# Altium PCB TransmitterBoard.PcbDoc
Units mil, origin at the board's own origin, x right, y up, seen from the top; angles counter-clockwise.
Board outline 2932.65 x 3079.69 mil, 2 copper layers (Top Layer, Bottom Layer), stack 61.756 mil thick; 93 components, 55 nets, 263 pads, 204 vias.
Unrouted connection lines stored in the file: 70.
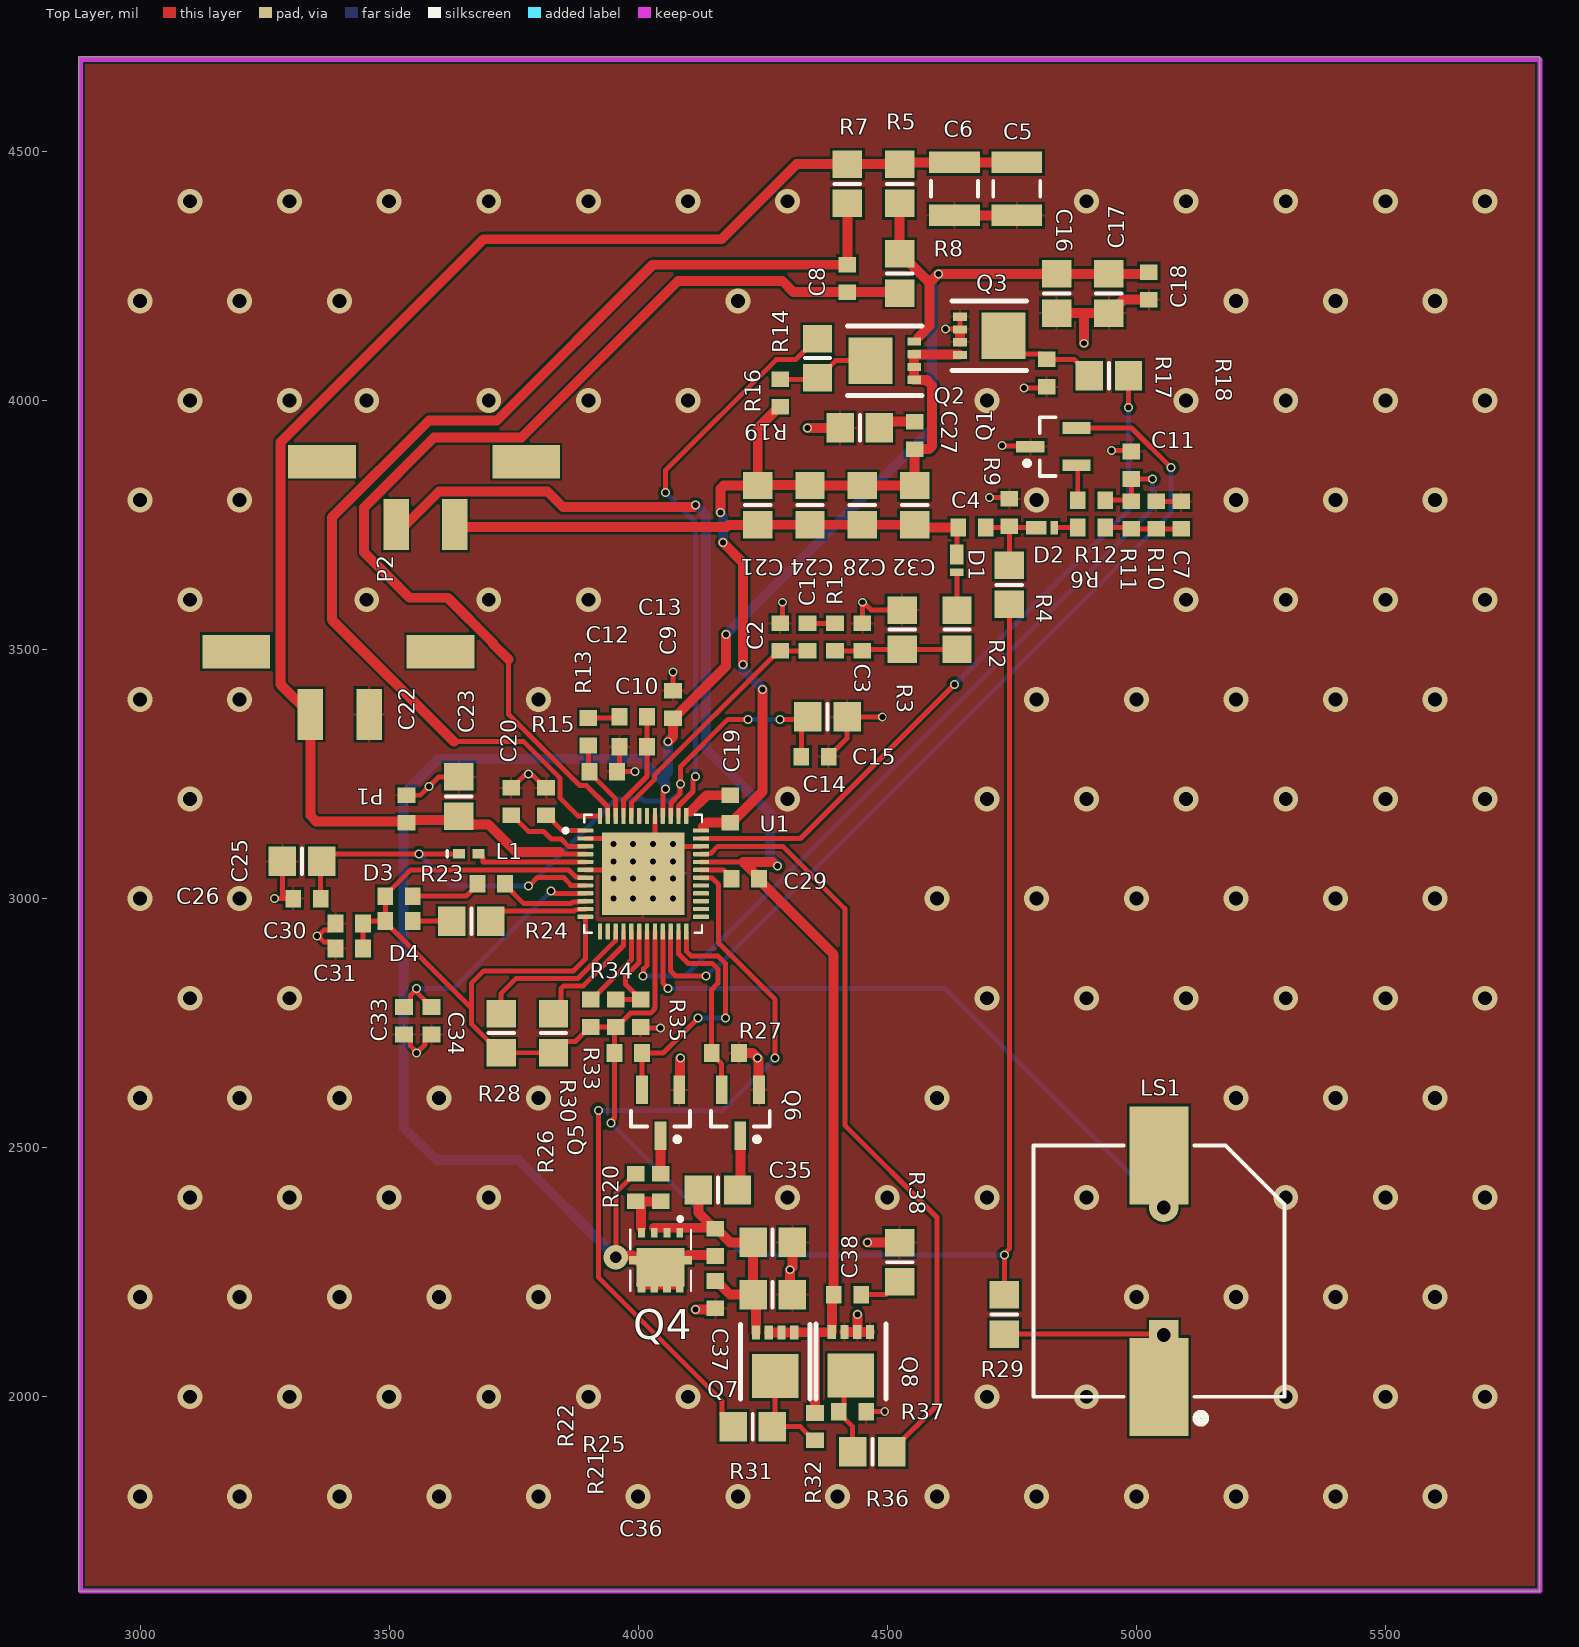
[diagram p0: Top Layer view]
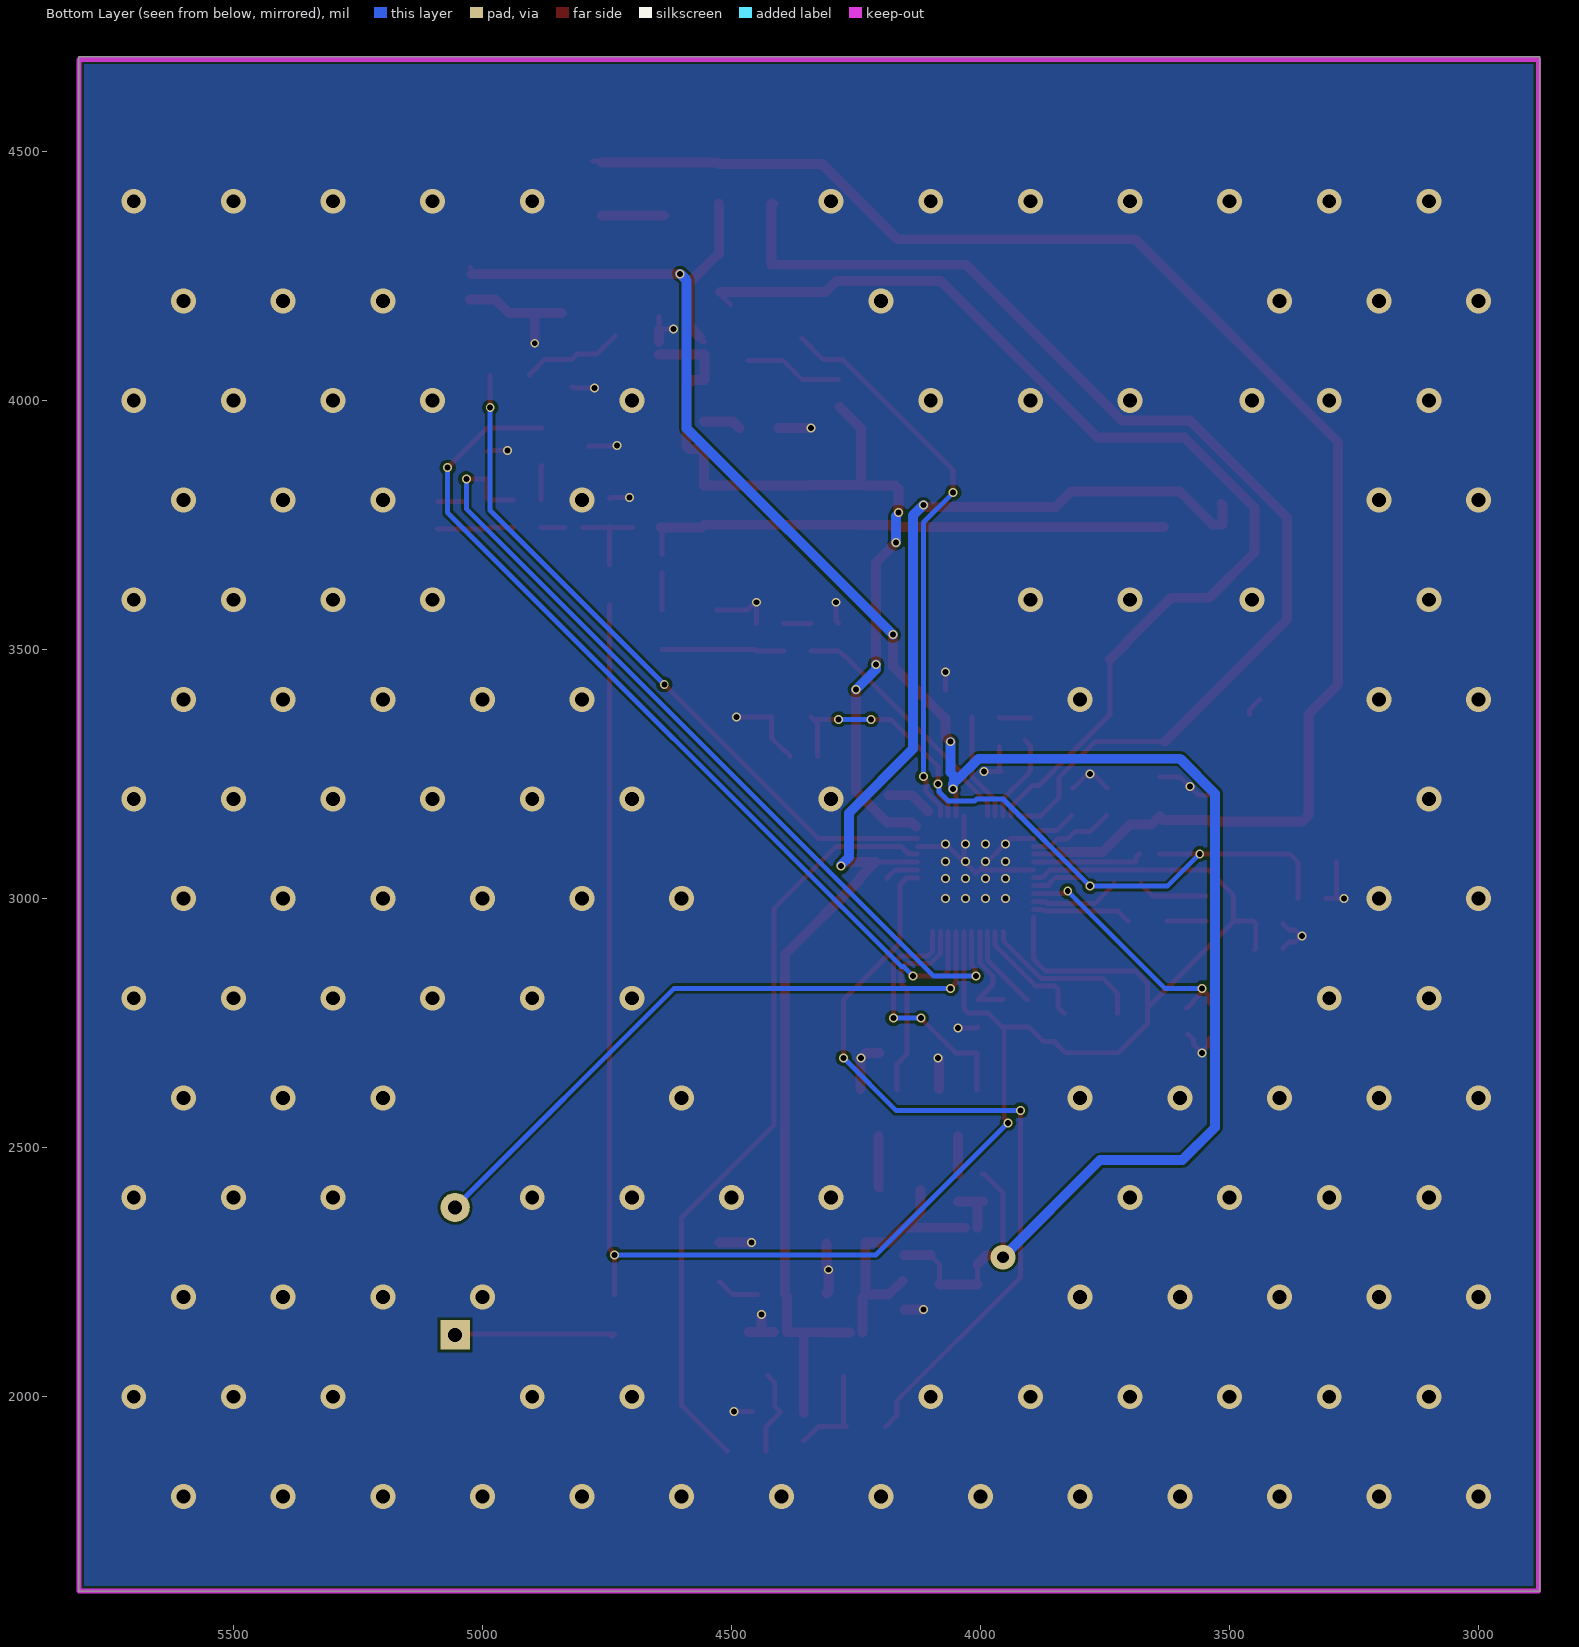
[diagram p1: Bottom Layer view, seen from below]

## Layer stack, top to bottom
Top Solder: solder mask 1, SM-001, Dk 4
Top Layer: signal copper 1.378
Dielectric 1: core 59, Core-043, Dk 4.3
Bottom Layer: signal copper 1.378
Bottom Solder: solder mask 1, SM-001, Dk 4

## Board outline
2877.35,1610 5810,1610 5810,4689.69 2877.35,4689.69

## Design rules (kind name [scope] priority, off if disabled: settings)
BoardOutlineClearance [All] p1: gap=7.87 ignorepadtopadclearanceinfootprint=FALSE
Clearance [All] p1: gap=5 ignorepadtopadclearanceinfootprint=FALSE except(9.84: Arc-Hole Track-Hole SMDPad-Hole THPad-Hole Via-Hole Fill-Hole Poly-Hole Region-Hole Text-Hole)
ComponentClearance [All] p1: gap=5 collisioncheckmode=3 verticalgap=5 showdistances=TRUE
DiffPairsRouting [All] p1: maxlimit=10 minlimit=5 mostfreqgap=5 toplayer_minwidth=5 toplayer_maxwidth=1000 toplayer_prefwidth=5 bottomlayer_minwidth=5 bottomlayer_maxwidth=1000 bottomlayer_prefwidth=5 maxuncoupledlength=500
Height [All] p1: minheight=0 maxheight=71497.94 prefheight=500
HoleSize [All] p1: absolutevalues=TRUE maxlimit=248.03 minlimit=11.81 maxpercent=80.000 minpercent=20.000
HoleToHoleClearance [All] p1: gap=9.84 allowstackedmicrovias=FALSE
MinimumAnnularRing [All] p1: minimumring=3
MinimumSolderMaskSliver [All] p1: minsoldermaskwidth=0
PlaneClearance [All] p1: clearance=5
PlaneConnect PlaneConnectPowerPads [InPadClass('PowerPads')] p1: planeconnectstyle=Direct reliefexpansion=20 reliefentries=4 reliefconductorwidth=10 reliefairgap=10
PlaneConnect [All] p2: pad.planeconnectstyle=Relief pad.reliefexpansion=11.81 pad.reliefentries=4 pad.reliefconductorwidth=5 pad.reliefairgap=5 via.planeconnectstyle=Direct via.reliefexpansion=11.81 via.reliefentries=4 via.reliefconductorwidth=5 via.reliefairgap=5
PolygonConnect PolygonConnectPowerPads [All vs (InPadClass('PowerPads'))] p1: connectstyle=Direct reliefconductorwidth=10 reliefentries=4 polygonreliefangle="90 Angle" airgapwidth=10
PolygonConnect [All] p2: thpad.connectstyle=Relief thpad.reliefconductorwidth=5 thpad.reliefentries=4 thpad.polygonreliefangle="90 Angle" thpad.airgapwidth=5 smdpad.connectstyle=Relief smdpad.reliefconductorwidth=5 smdpad.reliefentries=4 smdpad.polygonreliefangle="90 Angle" smdpad.airgapwidth=5 via.connectstyle=Direct via.reliefconductorwidth=5 via.reliefentries=4 via.polygonreliefangle="90 Angle" via.airgapwidth=5
RoutingVias [All] p1: holewidth=11.81 width=23.62 viastyle="Through Hole" minholewidth=11.81 minwidth=23.62 maxholewidth=23.62 maxwidth=259.84
SilkToSilkClearance [All] p1: silktosilkclearance=0
SilkToSolderMaskClearance [IsPad] p1: minsilkscreentomaskgap=5 clearancetoexposedcopper=TRUE
SolderMaskExpansion [All] p1: expansion=2.95 istentingtop=FALSE
Width [All] p1: maxlimit=1000 minlimit=5 preferedwidth=5 minimp=50.000000 maximp=50.000000 favimp=50.000000
20 further rules are at their usual default settings.

## Components (designator, comment, footprint, x,y, rotation, side; value= is the part's Value field where it differs from the comment)
C1 "Cap" 1608[0603] 4340,3525 r90 top value=22nF
C2 "Cap" 1608[0603] 4285,3525 r270 top value=680pF
C3 "Cap" 1608[0603] 4450,3525 r270 top value=5.6nF
C4 "Cap" 1608[0603] 4670,3745 r180 top value=5.6nF
C5 "Cap" C1210 4760,4425 r90 top value=22uF
C6 "Cap" C1210 4635,4425 r90 top value=22uF
C7 "Cap" 1608[0603] 5090,3770 r270 top value=5.6nF
C8 "Cap" 1608[0603] 4420,4245 r270 top value=1uF
C9 "Cap" 1608[0603] 4070,3390 r270 top value=100nF
C10 "Cap" 1608[0603] 3990,3365 r0 top value=6.8nF
C11 "Cap" 1608[0603] 4990,3870 r270 top value=1nF
C12 "Cap" 1608[0603] 3930,3255 r180 top value=56pF
C13 "Cap" 1608[0603] 3990,3305 r0 top value=56pF
C14 "Cap" 1608[0603] 4355,3285 r180 top value=100nF
C15 "Cap" 6-0805_M 4380,3365 r180 top value=10uF
C16 "Cap" 6-0805_M 4840,4215 r90 top value=10uF
C17 "Cap" 6-0805_M 4945,4215 r90 top value=10uF
C18 "Cap" 1608[0603] 5025,4230 r90 top value=100nF
C19 "Cap" 1608[0603] 4185,3180 r270 top value=100nF
C20 "Cap" 1608[0603] 3745,3195 r270 top value=1uF
C21 "Cap" 6-0805_M 4240,3790 r270 top value=100nF
C22 "Cap" 1608[0603] 3535,3180 r270 top value=100nF
C23 "Cap" 6-0805_M 3640,3205 r270 top value=10uF
C24 "Cap" 6-0805_M 4345,3790 r270 top value=68nF
C25 "Cap" 6-0805_M 3325,3075 r0 top value=10uF
C26 "Cap" 1608[0603] 3335,3000 r0 top value=100nF
C27 "Cap" 1608[0603] 4555,3930 r270 top value=22nF
C28 "Cap" 6-0805_M 4450,3790 r270 top value=47nF
C29 "Cap" 1608[0603] 4215,3040 r0 top value=100nF
C30 "Cap" 1608[0603] 3420,2950 r0 top value=1uF
C31 "Cap" 1608[0603] 3420,2900 r0 top value=100nF
C32 "Cap" 6-0805_M 4555,3790 r270 top value=NP
C33 "Cap" 1608[0603] 3530,2755 r90 top value=1uF
C34 "Cap" 1608[0603] 3585,2755 r90 top value=100nF
C35 "Cap" 6-0805_M 4270,2310 r180 top value=10uF
C36 "Cap" 6-0805_M 4270,2205 r180 top value=10uF
C37 "Cap" 1608[0603] 4155,2205 r90 top value=100nF
C38 "Cap" 1608[0603] 4420,2205 r180 top value=22nF
D1 "Diode" X3-WLB1608-2 4640,3679.35 r90 top
D2 "Diode" X3-WLB1608-2 4810.65,3745 r180 top
D3 "LED0" 1608[0603] 3520,3005 r0 top
D4 "LED0" 1608[0603] 3520,2955 r0 top
L1 "Inductor" 0402-A 3660,3090 r0 top value=4.7uH
LS1 "Buzzer" ABSM-1574 5045.55,2019.76 r90 top
P1 "Header 2" 2-1445096-2 3460,3370 r180 top
P2 "Header 2" 2-1445096-2 3632.02,3751.03 r180 top
Q1 "MOSFET-N" SOT23_M 4833.74,3907.4 r180 top
Q2 "NMOS-2" DMG7430LFG-7 4495,4080 r90 top
Q3 "NMOS-2" DMG7430LFG-7 4705,4130 r270 top
Q4 "PMOS-2" TRANS_AONR21321 4045,2274.17 r270 top
Q5 "MOSFET-N" SOT23_M 4045,2570 r270 top
Q6 "MOSFET-N" SOT23_M 4205,2570 r270 top
Q7 "NMOS-2" DMG7430LFG-7 4275,2070 r180 top
Q8 "NMOS-2" DMG7430LFG-7 4427.2,2070.94 r180 top
R1 "Res1" 1608[0603] 4395,3525 r270 top value=10k
R2 "Res1" 6-0805_M 4640,3540 r90 top value=2.4k
R3 "Res1" 6-0805_M 4530,3540 r270 top value=200k
R4 "Res1" 6-0805_M 4745,3630 r270 top value=200k
R5 "Res1" 6-0805_M 4525,4435 r270 top value=20m
R6 "Res1" 1608[0603] 4910,3745 r180 top value=1k
R7 "Res1" 6-0805_M 4420,4435 r90 top value=10
R8 "Res1" 6-0805_M 4525,4255 r90 top value=10
R9 "Res1" 1608[0603] 4745,3775 r270 top value=100k
R10 "Res1" 1608[0603] 5040,3770 r270 top value=390k
R11 "Res1" 1608[0603] 4990,3770 r270 top value=390k
R12 "Res1" 1608[0603] 4910,3800 r180 top value=10k
R13 "Res1" 1608[0603] 3900,3335 r90 top value=10k
R14 "Res1" 6-0805_M 4360,4085 r270 top value=12
R15 "Res1" 1608[0603] 3815,3195 r270 top value=1k
R16 "Res1" 1608[0603] 4285,4015 r90 top value=100k
R17 "Res1" 6-0805_M 4945,4050 r180 top value=12
R18 "Res1" 1608[0603] 4820,4055 r90 top value=100k
R19 "Res1" 6-0805_M 4445,3945 r0 top value=100m
R20 "Res1" 1608[0603] 3995,2420 r90 top value=10k
R21 "Res1" 1608[0603] 4155,2310 r270 top value=220
R22 "Res1" 1608[0603] 4045,2420 r270 top value=10k
R23 "Res1" 1608[0603] 3705,3030 r0 top value=1k
R24 "Res1" 6-0805_M 3665,2955 r0 top value=680
R25 "Res1" 6-0805_M 4160,2415 r180 top value=3
R26 "Res1" 1608[0603] 3980,2690 r180 top value=10k
R27 "Res1" 1608[0603] 4175,2690 r180 top value=100k
R28 "Res1" 6-0805_M 3725,2730 r270 top value=5.1k
R29 "Res1" 6-0805_M 4735,2165 r90 top value=100
R30 "Res1" 6-0805_M 3830,2730 r270 top value=5.1k
R31 "Res1" 6-0805_M 4230,1940 r0 top value=12
R32 "Res1" 1608[0603] 4355,1940 r270 top value=100k
R33 "Res1" 1608[0603] 3905,2770 r90 top value=10k
R34 "Res1" 1608[0603] 3955,2770 r90 top value=10k
R35 "Res1" 1608[0603] 4005,2770 r270 top value=NP
R36 "Res1" 6-0805_M 4470,1890 r180 top value=12
R37 "Res1" 1608[0603] 4430,1970 r180 top value=100k
R38 "Res1" 6-0805_M 4525,2270 r270 top value=100m
U1 "P9242-RNDGI8" QFN40P600X600X100-49N 4010,3050 r0 top

## Footprints (in the part's own frame and the unit in brackets; to place one, negate y for a bottom-side part, rotate by r counter-clockwise, add the part's x,y. Pads: shape width x height; smd on the part's side, far side on the other; paste and mask are expansions set on the pad)
2-1445096-2 [mm]
  rect 1.3x2.6 smd: 1(0,0) 2(3,0)
  rect 3.45x1.7 smd: 3(-3.635,-3.2) 4(6.775,-3.2)
6-0805_M [mm] "Chip Resistor, Body 2.0x1.2mm, IPC Low Density"
  rect 1.4x1.5 smd: 1(-1,0) 2(1,0)
  silkscreen extent 0,-0.65 0,0.65, body extent -1.07,-0.7 1.07,0.7, height 0.7
0402-A [mm] "Chip Inductor, Body 1.0x0.5mm, IPC High Density"
  rect 0.6x0.5 smd: 1(-0.5,0) 2(0.5,0)
  silkscreen extent -1.1,-0.15 -1.1,0.15, body extent -0.55,-0.3 0.55,0.3, height 0.55
1608[0603] [mm] "Chip Capacitor, Body 1.6x0.8mm, IPC High Density"
  rect 0.8x0.9 smd: 1(-0.7,0) 2(0.7,0)
  body extent -0.87,-0.48 0.87,0.48, height 1.3
ABSM-1574 [mm] "Magnetic Transducer Buzzer"
  rect 5x3 smd: 1(0,0) 2(11.8,0)
  rect 1.5x1.5 hole 0.7: 1A(2.65,-0.24)
  round 1.5 hole 0.7: 2A(9.15,-0.24)
  silkscreen extent -1.83,-6.4 12.3,6.4
C1210 [mm] "Chip Capacitor, Body 3.2x2.5mm, IPC High Density"
  rect 1.1x2.6 smd: 1(-1.35,0) 2(1.35,0)
  silkscreen extent -0.4,-1.2 0.4,1.2, body extent -1.7,-1.35 1.7,1.35, height 1.3
DMG7430LFG-7 [mm]
  rect 2.37x2.25 smd: 1(0,0.725)
  rect 0.42x0.7 smd: 2(0.975,-1.5) 3(-0.975,-1.5) 3(-0.325,-1.5) 3(0.325,-1.5)
  silkscreen extent -1.78,-1.91 1.78,1.91, body extent -1.68,-1.68 1.68,1.68, height 0.85
QFN40P600X600X100-49N [mm]
  rrect25% 0.81x0.22 smd: 1(-2.95,2.2) 2(-2.95,1.8) 3(-2.95,1.4) 4(-2.95,1) 5(-2.95,0.6) 6(-2.95,0.2) 7(-2.95,-0.2) 8(-2.95,-0.6) 9(-2.95,-1) 10(-2.95,-1.4) 11(-2.95,-1.8) 12(-2.95,-2.2) 25(2.95,-2.2) 26(2.95,-1.8) 27(2.95,-1.4) 28(2.95,-1) 29(2.95,-0.6) 30(2.95,-0.2) 31(2.95,0.2) 32(2.95,0.6) 33(2.95,1) 34(2.95,1.4) 35(2.95,1.8) 36(2.95,2.2)
  rrect25% 0.22x0.81 smd: 13(-2.2,-2.95) 14(-1.8,-2.95) 15(-1.4,-2.95) 16(-1,-2.95) 17(-0.6,-2.95) 18(-0.2,-2.95) 19(0.2,-2.95) 20(0.6,-2.95) 21(1,-2.95) 22(1.4,-2.95) 23(1.8,-2.95) 24(2.2,-2.95) 37(2.2,2.95) 38(1.8,2.95) 39(1.4,2.95) 40(1,2.95) 41(0.6,2.95) 42(0.2,2.95) 43(-0.2,2.95) 44(-0.6,2.95) 45(-1,2.95) 46(-1.4,2.95) 47(-1.8,2.95) 48(-2.2,2.95)
  rect 4.2x4.2 smd paste-3: 49(0,0)
  silkscreen extent -4.06,-3 3,3
SOT23_M [mm] "SOT23, 3-Leads, Body 2.9x1.3mm, Pitch 0.95mm, Lead Span 2.3mm - Reverse Pinning, IPC Low Density"
  rect 1.45x0.6 smd: 1(1.175,0) 2(-1.175,-0.95) 3(-1.175,0.95)
  silkscreen extent -0.1,-1.5 1.47,1.5, body extent -0.7,-1.5 0.7,1.5, height 1.1
TRANS_AONR21321 [mm]
  rect 0.5x0.35 smd: 1(-1.4,-0.975) 3(-1.4,0.975) 3(-1.4,-0.325) 3(-1.4,0.325)
  rect 0.43x0.38 smd: 2(0,1.415) 2(0,-1.415)
  rect 1.98x2.45 smd paste-2: 2(0.36,0)
  rect 0.3x0.4 smd: 2(1.5,0.975) 2(1.5,-0.325) 2(1.5,0.325) 2(1.5,-0.975)
  silkscreen extent -2.2,-1.55 1.55,1.55
X3-WLB1608-2 [mm]
  rect 1.035x0.69 smd: 1(0.293,0)
  rect 0.385x0.69 smd: 2(-0.619,0)
  body extent -0.81,-0.42 0.81,0.42, height 0.3

## Part data
C1 C2 C3 C4 C5 C6 C7 C8 C9 C10 C11 C12 C13 C14 C15 C16 C17 C18 C19 C20 C21 C22 C23 C24 C25 C26 C27 C28 C29 C30 C31 C32 C33 C34 C35 C36 C37 C38: "Capacitor", LatestRevisionDate=17-Jul-2002, LatestRevisionNote="Re-released for DXP Platform.", PackageDescription="Radial Cap, Thru-Hole; 2 Leads; 0.3 in Pin Spacing", PackageReference=RAD-0.3, Published=8-Jun-2000, Publisher="Altium Limited"
D1 D2: "Default Diode", Code_JEDEC=DO-214-AB, LatestRevisionDate=17-Jul-2002, LatestRevisionNote="Re-released for DXP Platform.", PackageDescription="DO-214-AB/SMC; 2 C-Bend Leads; Body 7.9 x 5.9 mm, inc. leads (LxW)", PackageReference=SMC, PackageVersion=Sep-1996, Published=8-Jun-2000, Publisher="Altium Limited"
LS1: "Magnetic Transducer Buzzer", ComponentLink1Description="Manufacturer Link", ComponentLink1URL=http://www.megastar.com/linecard/buzzmode/index.php, DatasheetVersion=17-Dec-2003, LatestRevisionDate=17-Dec-2003, LatestRevisionNote="Schematic revised, PCB Footprint replaced.", PackageDescription="Magnetic Transducer Buzzer", PackageReference=ABSM-1574, Published=24-Mar-1999, Publisher="Altium Limited"
P1 P2: "Header, 2-Pin", LatestRevisionDate=17-Jul-2002, LatestRevisionNote="Re-released for DXP Platform.", Publisher="Altium Limited"
Q1 Q5 Q6: "N-Channel MOSFET", LatestRevisionDate=17-Jul-2002, LatestRevisionNote="Re-released for DXP Platform.", PackageDescription="TO, Flat Index; 3 In-Line, Axial Leads; Body Dia. 4.6mm; Lead Dia. 0.5 mm (max)", PackageReference=E3, PackageVersion=1995/1996, Published=8-Jun-2000, Publisher="Altium Limited"
Q2 Q3 Q7 Q8: "N-Channel Power MOSFET", ComponentLink1Description="Manufacturer Link", ComponentLink1URL=http://www.irf.com/, DatasheetVersion=PD-9.814, LatestRevisionDate=17-Jul-2002, LatestRevisionNote="Re-released for DXP Platform.", Note="Pin 2 is electrically connected to pin 4.", PackageDescription="TO, Thru-Hole, Vertical, Heatsink Mounted; 3 In-Line Leads; Pitch 2.54 mm", PackageReference=TO-220AB, PackageVersion=Feb-1997, Published=8-Jun-2000, Publisher="Altium Limited"
Q4: "P-Channel Power MOSFET", ComponentLink1Description="Manufacturer Link", ComponentLink1URL=http://www.irf.com/, DatasheetVersion=PD-9.390D, LatestRevisionDate=17-Jul-2002, LatestRevisionNote="Re-released for DXP Platform.", Note="Pin 4 not drawn and electrically connected to Pin 2.", PackageDescription="TO, Thru-Hole, Vertical, Heatsink Mounted; 3 In-Line Leads; Pitch 2.54 mm", PackageReference=TO-220AB, PackageVersion=Feb-1997, Published=8-Jun-2000, Publisher="Altium Limited"
R1 R2 R3 R4 R5 R6 R7 R8 R9 R10 R11 R12 R13 R14 R15 R16 R17 R18 R19 R20 R21 R22 R23 R24 R25 R26 R27 R28 R29 R30 R31 R32 R33 R34 R35 R36 R37 R38: "Resistor", LatestRevisionDate=17-Jul-2002, LatestRevisionNote="Re-released for DXP Platform.", PackageDescription="Axial Device, Thru-Hole; 2 Leads; 0.3 in Pin Spacing", PackageReference=AXIAL-0.3, Published=8-Jun-2000, Publisher="Altium Limited"
U1: library part Component_1
D3 D4: LatestRevisionDate=08-Jul-2005, LatestRevisionNote="Mech Layer 1 removed.", PackageDescription="LED; 2 Leads", PackageReference=LED-0, Published=8-Jun-2000, Publisher="Altium Limited"
L1: Code_IEC=1005, Code_JEITA=0402, LatestRevisionDate=29-May-2009, LatestRevisionNote="IPC-7351 Footprint Added.", PackageDescription="Chip Inductor", PackageReference=0402-A, Published=8-Jun-2000, Publisher="Altium Limited"

## Via types
v1: diameter 50, hole 28, Top Layer to Bottom Layer, 130 vias
v2: diameter 18, hole 12, Top Layer to Bottom Layer, 73 vias
v3: diameter 50, hole 23.62, Top Layer to Bottom Layer, 1 vias

## Nets (pads, with @x,y where several pads share a name; then routed paths per layer and width w, separated by ;. In a path a pad name is that pad's centre, name@x,y a point inside that pad or via, vN(x,y) a via of type N, cw(c..) or ccw(c..) an arc to the next point about the centre after c; other vN are vias at no path point)
GND: C2.1 C3.1 C5.1 C6.1 C7.1 C9.1 C11.1 C12.1 C13.1 C14.1 C15.1 C16.1 C17.1 C18.1 C20.1 C22.1 C23.1 C25.1 C26.1 C30.1 C31.1 C33.1 C34.1 C35.1 C36.1 C37.1 P1.1 Q1.1 Q3.3 Q5.3 Q6.3 Q8.3 R3.1 R9.1 R10.1 R15.1 R18.1 R19.1 R27.1 R35.2 R37.1 R38.1 U1.2 U1.6 U1.34 U1.41 U1.49 | length 2900.7
  Top Layer w10: v2@3270,3002.16 v2(3270,3000) 3288.72,3000 ; C25.1 3285.63,3003.09 3288.72,3000 ; C26.1 3288.72,3000 ; v2(3355,2925) v2@3357.16,2925 ; C31.1 3392.44,2901.97 3381.69,2912.72 3369.45,2912.72 v2@3357.16,2925 ; C30.1 3392.44,2948.03 3381.69,2937.28 3369.45,2937.28 v2@3357.16,2925 ; P1.1@3439.41,3400 3460,3379.41 P1.1 ; C33.1 3531.97,2727.44 3542.72,2716.69 3542.72,2704.45 3555,2692.16 v2(3555,2690) 3572.28,2707.28 3572.28,2716.69 3583.03,2727.44 C34.1 ; C22.1 3562.56,3207.56 v2(3580,3225) 3599.37,3244.37 C23.1 ; C20.1 3746.97,3222.56 v2@3772.88,3248.47 ; v2(3780,3250) 3781.53,3248.47 3787.12,3248.47 3813.03,3222.56 R15.1 ; U1.6 U1.49@4002.13,3057.87 ; U1.2 3939.13,3120.87 v2(3950,3110) U1.49@4002.13,3057.87 ; C13.1 3962.44,3259.88 C12.1 v2(3993.56,3255) ; U1.49@3987.5,3072.5 U1.49@4002.13,3057.87 ; R35.2 4007.44,2740 v2(4045,2740) ; U1.49@4033.62,3110 U1.41 4033.62,3076.38 U1.49@4034.31,3075.69 ; U1.49@4070,3105.12 U1.34 ; v2(4070,3110) 4035.69,3075.69 U1.49@4034.31,3075.69 ; C9.1 v2(4070,3455) ; Q5.3 Q5.3@4083.7,2617.56 ; v2@4083.7,2678.7 v2(4085,2680) ; C37.1@4152.56,2175 C37.1 ; v2(4240,2680) v2@4241.2,2678.8 ; Q6.3@4241.2,2617.46 Q6.3 ; C2.1 4290,3557.56 v2(4290,3595) ; C36.1 C36.1@4309.37,2206.97 ; C35.1@4309.37,2308.03 C35.1 ; C14.1 4382.56,3286.97 4393.31,3297.72 4395.27,3297.72 4419.37,3321.81 C15.1 v2(4490,3365) ; C3.1 v2(4450,3595) 4452.16,3595 4467.79,3579.37 R3.1 ; R37.1 v2(4495,1970) ; R38.1@4524.37,2310 R38.1 ; v2(4616.84,4143.73) 4617.3,4143.26 4645.48,4143.26 4645.94,4142.8 Q3.3@4645.94,4168.39 ; v2(4705,3805) 4742.56,3805 R9.1 ; v2(4730,3910) 4731.3,3908.7 4786.18,3908.7 Q1.1 ; v2(4775,4025) 4817.56,4025 R18.1 ; 4892.5,4175.63 4895,4173.13 ; C17.1 C17.1@4946.97,4175.63 ; v2(4950,3900) 4987.56,3900 C11.1 ; R10.1 C7.1 ; U1.49@4002.13,3057.87 U1.49 4010,3051.38 U1.49@4034.31,3075.69
  Top Layer w20: Q5.3@4083.7,2617.56 v2@4083.7,2678.7 ; v2(4115,2175) C37.1@4152.56,2175 ; R27.1 4230,2690 v2(4240,2680) ; Q6.3@4241.2,2617.46 v2@4241.2,2678.8 ; C36.1@4309.37,2206.97 4305,2211.34 v2(4305,2255) 4309.37,2259.37 C35.1@4309.37,2308.03 ; v2(4340,3945) R19.1 ; Q8.3@4414.41,2130 Q8.3@4440,2130 ; v2(4440,2165) Q8.3@4440,2130 ; v2(4460,2310) R38.1@4524.37,2310 ; Q8.3@4465.59,2130 Q8.3@4440,2130 ; C6.1 C5.1 ; Q3.3@4645.94,4117.2 Q3.3@4645.94,4142.8 ; C16.1 4892.5,4175.63 C17.1 ; v2(4895,4115) 4895,4173.13 ; C17.1@4946.97,4175.63 4973.78,4202.44 C18.1
  other v1: 3000,1800 3200,1800 3400,1800 3600,1800 3800,1800 4000,1800 4200,1800 4400,1800 4600,1800 4800,1800 5000,1800 5200,1800 5400,1800 5600,1800 3100,2000 3300,2000 3500,2000 3700,2000 3900,2000 4100,2000 4700,2000 4900,2000 5300,2000 5500,2000 5700,2000 3000,2200 3200,2200 3400,2200 3600,2200 3800,2200 5000,2200 5200,2200 5400,2200 5600,2200 3100,2400 3300,2400 3500,2400 3700,2400 4300,2400 4500,2400 4700,2400 4900,2400 5300,2400 5500,2400 5700,2400 3000,2600 3200,2600 3400,2600 3600,2600 3800,2600 4600,2600 5200,2600 5400,2600 5600,2600 3100,2800 3300,2800 4700,2800 4900,2800 5100,2800 5300,2800 5500,2800 5700,2800 3000,3000 3200,3000 4600,3000 4800,3000 5000,3000 5200,3000 5400,3000 5600,3000 3100,3200 4300,3200 4700,3200 4900,3200 5100,3200 5300,3200 5500,3200 5700,3200 3000,3400 3200,3400 3800,3400 4800,3400 5000,3400 5200,3400 5400,3400 5600,3400 3100,3600 3455,3600 3700,3600 3900,3600 5100,3600 5300,3600 5500,3600 5700,3600 3000,3800 3200,3800 4800,3800 5200,3800 5400,3800 5600,3800 3100,4000 3300,4000 3455,4000 3700,4000 3900,4000 4100,4000 4700,4000 5100,4000 5300,4000 5500,4000 5700,4000 3000,4200 3200,4200 3400,4200 4200,4200 5200,4200 5400,4200 5600,4200 3100,4400 3300,4400 3500,4400 3700,4400 3900,4400 4100,4400 4300,4400 4900,4400 5100,4400 5300,4400 5500,4400 5700,4400
  other v2: 3950,3000 3990,3000 4030,3000 4070,3000 3950,3040 3990,3040 4030,3040 4070,3040 3950,3075 3990,3075 4030,3075 4070,3075 3990,3110 4030,3110
ISNS_H: C8.1 R7.1 U1.48 | length 2300.3
  Top Layer w10: 3630,3315 3770.16,3315 3842.72,3242.45 3842.72,3202.34 3878.91,3166.14 U1.48 ; R7.1@4410,4395.63 R7.1@4411.97,4395.63
  Top Layer w20: 3630,3315 3385,3560 3385,3765 3580,3960 3716.57,3960 4029.13,4272.56 C8.1 R7.1
ISNS_IN: C10.2 C13.2 U1.45 | length 218.3
  Top Layer w10: U1.45 3970.63,3198.13 4017.56,3245.06 C10.2
ISNS_L: C8.2 R8.1 U1.47 | length 2179.8
  Top Layer w10: 3740,3480 3740,3369.83 3882.55,3227.28 3896.03,3227.28 3938.46,3184.85 3938.46,3166.81 U1.47 ; R8.1@4502.44,4193.07 R8.1 R8.1@4523.19,4217.44
  Top Layer w20: 3740,3480 3708.62,3511.38 3708.62,3513.07 3617.65,3604.03 3540.97,3604.03 3450,3695 3450,3785.1 3590.38,3925.47 3765.47,3925.47 4080,4240 4289.45,4240 4312.01,4217.44 C8.2 R8.1@4523.19,4217.44
ISNS_OUT: C12.2 R13.1 U1.46 | length 179.2
  Top Layer w10: R13.1@3910.75,3318.19 R13.1 3900,3257.44 C12.2 3902.44,3253.03 3954.88,3200.59 U1.46
LDO18: C33.2 C34.2 U1.9 | length 516.7
  Top Layer w10: C33.2 3531.97,2782.56 3542.72,2793.31 3542.72,2805.55 3555,2817.84 v2(3555,2820) 3556.53,2818.47 3556.53,2811.03 3572.28,2795.27 3572.28,2793.31 3583.03,2782.56 C34.2 C34.2@3587.56,2780 ; v2@3831.53,3010.63 U1.9
  Bottom Layer w10: v2(3555,2820) 3630,2820 v2(3825,3015)
LDO33: C30.2 C31.2 D3.1 D4.1 R4.2 R26.2 R28.2 R29.2 R30.2 R33.1 R34.1 U1.7 U1.12 U1.20 | length 4312.9
  Top Layer w10: C31.2@3450,2897.56 C31.2 C30.2 3452.56,2955 D4.1 ; D3.1 D4.1 ; D3.1@3493.96,3008.48 3543.19,3057.72 3860.23,3057.72 3874.41,3043.54 3878.92,3043.54 3879.67,3042.8 3893.19,3042.8 U1.7 ; U1.12 3893.86,2878.86 3870,2855 3690,2855 3665,2830 3665,2780.47 ; v2(3945,2550) 3945,2552.16 3952.44,2559.6 R26.2 R34.1@3952.44,2739.88 ; U1.20 4033.62,2781.38 4032.72,2780.47 4032.72,2777.67 4025.05,2770 3984.53,2770 3954.41,2739.88 R34.1@3952.44,2739.88 ; R29.2 v2(4735,2285) 4735,2287.16 4745,2297.16 R4.2 ; D4.1 3492.44,2953.03 3665,2780.47 ; 3665,2780.47 3665,2748.66 3723.03,2690.63 R28.2 R30.2 3852.56,2713.19 3873.78,2713.19 3903.03,2742.44 R33.1 R34.1 R34.1@3952.44,2739.88
  Bottom Layer w10: v2(3945,2550) 4210,2285 v2(4735,2285)
LED1: R23.2 U1.10 | length 181
  Top Layer w10: R23.2 3732.56,3028.03 3770.59,2990 3865.48,2990 3868.94,2993.46 3878.92,2993.46 3879.67,2994.21 3893.19,2994.21 U1.10
LED2: R24.2 U1.11 | length 199.5
  Top Layer w10: R24.2 3724.37,2975 3871.69,2975 3874.41,2977.72 3878.92,2977.72 3879.67,2978.46 3893.19,2978.46 U1.11
NetC1_1: C1.1 C2.2 U1.44 | length 511.5
  Top Layer w10: U1.44 3986.38,3192.66 4032.56,3238.85 4032.56,3247.56 4271.69,3486.69 4274.25,3486.69 C2.2 C1.1
NetC1_2: C1.2 R1.1 | length 55.2
  Top Layer w10: C1.2 R1.1 R1.1@4394.88,3552.44
NetC3_2: C3.2 R1.2 R2.1 R3.2 | length 246.3
  Top Layer w10: R1.2 C3.2 4453.19,3500.63 R3.2 R2.1
NetC4_1: C4.1 D2.1 R4.1 R9.2 | length 181.6
  Top Layer w10: C4.1 4742.56,3745 R9.2 ; R4.1 R9.2 ; D2.1 4747.44,3745 R9.2
NetC4_2: C4.2 C21.2 C24.2 C28.2 C32.2 D1.1 P2.1 | length 1069.8
  Top Layer w10: C21.2@4239.87,3750.5 C21.2 ; C32.2 C32.2@4560.63,3745 ; D1.1 4640,3742.56 C4.2
  Top Layer w20: P2.1@3632.02,3746 4177.01,3746 4181.51,3750.5 C21.2@4239.87,3750.5 ; C21.2 C24.2 C28.2 C32.2 ; C32.2@4560.63,3745 C4.2
NetC7_2: C7.2 R6.1 R10.2 R11.2 | length 153.7
  Top Layer w10: R6.1 4987.44,3745 R11.2 R10.2 C7.2 C7.2@5089.88,3742.32
NetC10_1: C10.1 R13.2 | length 63.5
  Top Layer w10: R13.2 3960,3362.56 C10.1
NetC19_1: C19.1 U1.37 | length 93.5
  Top Layer w20: 4105,3175 4137.56,3207.56 C19.1
NetC19_2: C19.2 C21.1 C24.1 C27.2 C28.1 C32.1 Q2.3 Q3.2 R16.1 U1.36 | length 1779.8
  Top Layer w10: 4165,3823.51 4170.86,3829.37 ; C19.2 C19.2@4186.97,3152.44 ; C21.1 C21.1@4240.63,3830 ; R16.1@4283.03,3987.44 R16.1 ; C24.1@4344.37,3830 C24.1 ; Q2.3@4554.06,4092.8 Q2.3@4554.65,4092.2 ; Q3.2@4645.35,4092.2 Q3.2
  Top Layer w20: 4130,3145 4137.44,3152.44 C19.2 ; v2(4165,3775) 4165,3823.51 ; v2(4170,3715) 4210,3675 v2(4210,3470) ; 4170.86,3829.37 C21.1 4240,3944.41 R16.1@4283.03,3987.44 ; C19.2@4186.97,3152.44 4250,3215.47 v2(4250,3420) ; C21.1@4240.63,3830 C24.1@4344.37,3830 ; C24.1 C28.1 C32.1 C27.2 4584.14,3902.44 4590,3908.3 4590,4030 4578.39,4041.61 4554.06,4041.61 4554.06,4067.2 Q2.3@4554.06,4092.8 ; Q2.3@4554.65,4092.2 Q3.2@4645.35,4092.2
  Bottom Layer w10: v2(4165,3775) 4165,3772.84 v2@4169,3768.84
  Bottom Layer w20: v2@4169,3768.84 4170,3767.84 v2(4170,3715) ; v2(4210,3470) 4210,3460 v2(4250,3420)
NetC20_2: C20.2 U1.3 | length 174.7
  Top Layer w5: C20.2 C20.2@3746.97,3167.44
  Top Layer w10: C20.2@3746.97,3167.44 3779.41,3135 3810,3135 3825,3120 3845,3120 3859.88,3105.12 U1.3
NetC27_1: C27.1 R19.2 | length 75.8
  Top Layer w20: R19.2 4496.93,3957.56 C27.1
NetC29_1: C29.1 U1.31 | length 69.9
  Top Layer w10: U1.31 4171.54,3057.87 4187.44,3041.97 C29.1
NetC35_2: C35.2 C36.2 C37.2 Q4.3 Q7.2 R21.1 R25.2 | length 570
  Top Layer w10: R21.1@4151.3,2339.29 4153.03,2337.56 R21.1 R21.1@4156.97,2337.56 ; C37.2 C37.2@4156.97,2232.56 ; C36.2 C36.2@4236.61,2199.02
  Top Layer w20: 4031.61,2339.29 4057.21,2339.29 4082.8,2339.29 4151.3,2339.29 4120.63,2369.96 R25.2 ; C37.2@4156.97,2232.56 4184.53,2205 C36.2 C35.2 4184.53,2310 R21.1@4156.97,2337.56 ; Q7.2 C36.2@4236.61,2199.02
NetC38_1: C38.1 R38.2 | length 88.1
  Top Layer w10: C38.1 4497.4,2205 4523.03,2230.63 R38.2
NetD1_2: D1.2 R2.2 | length 75.6
  Top Layer w10: R2.2 D1.2
NetD2_2: D2.2 R6.2 | length 47.4
  Top Layer w10: D2.2 R6.2
NetD3_2: D3.2 R23.1 | length 141.4
  Top Layer w10: D3.2 3654.41,3005 3677.44,3028.03 R23.1
NetD4_2: D4.2 R24.1 | length 78.1
  Top Layer w10: D4.2 R24.1
NetL1_2: L1.2 U1.5 | length 226.8
  Top Layer w10: L1.2 3681.65,3090 3686.5,3085.16 3686.5,3083.19 3688.03,3081.65 3688.03,3073.62 U1.5
NetLS1_1: LS1.1 LS1.1A R29.1 | length 327.3
  Top Layer w10: R29.1@4739.72,2120.91 R29.1 5053.46,2125.63 LS1.1A
NetLS1_2: LS1.2 LS1.2A U1.21 | length 1295.5
  Top Layer w10: U1.21 4049.37,2830.63 v2(4060,2820)
  Bottom Layer w10: v2(4060,2820) 4615,2820 LS1.2A
NetQ1_3: Q1.3 R12.2 | length 71
  Top Layer w10: Q1.3 4882.44,3867.56 R12.2
NetQ2_1: Q2.1 R14.2 R16.2 | length 197
  Top Layer w10: R16.2 4358.9,4042.56 4396.34,4080 Q2.1
NetQ3_1: Q3.1 R17.2 R18.2 | length 206.4
  Top Layer w10: Q3.1 4770.24,4093.31 4809.25,4093.31 R18.2 4875.04,4082.56 4905.63,4051.97 R17.2
NetQ4_1: Q4.1 R20.1 R22.2 | length 107.6
  Top Layer w10: R20.1 3995.28,2392.44 R20.1@4006.02,2381.69
  Top Layer w20: R20.1@3995.28,2392.44 R22.2 ; 4006.02,2339.29 R20.1@4006.02,2381.69
NetQ5_1: Q5.1 R22.1 | length 76.2
  Top Layer w20: R22.1 Q5.1
NetQ6_1: Q6.1 R25.1 | length 111.1
  Top Layer w10: R25.1 R25.1@4205,2420.63
  Top Layer w20: R25.1@4205,2420.63 Q6.1
NetQ7_1: Q7.1 R31.2 R32.2 | length 200.8
  Top Layer w10: Q7.1 4275,1945.63 R31.2 4325.47,1940 4353.03,1912.44 R32.2
NetQ8_1: Q8.1 R36.2 R37.2 | length 174.3
  Top Layer w10: Q8.1 4413.19,2028.38 4413.19,1980.75 R37.2 4402.44,1968.03 4430.63,1939.84 R36.2
NetR14_1: R14.1 U1.38 | length 1147.5
  Top Layer w10: v2(4055,3815) 4055,3860.17 4276.96,4082.13 4315.79,4082.13 4358.03,4124.37 R14.1 ; U1.38 4080.87,3185.87 4110,3215 4110,3237.84 4115,3242.84 v2(4115,3245)
  Bottom Layer w10: v2(4055,3815) 4115,3755 v2(4115,3245)
NetR15_2: R15.2 U1.1 | length 91.6
  Top Layer w5: R15.2 R15.2@3816.97,3167.44
  Top Layer w10: R15.2@3816.97,3167.44 3847.79,3136.61 U1.1
NetR17_1: R17.1 U1.35 | length 1401.6
  Top Layer w10: U1.35 4325.87,3120.87 v2(4635,3430) ; v2(4984.37,3985.63) R17.1
  Bottom Layer w10: v2(4635,3430) 4984.37,3779.37 v2(4984.37,3985.63)
NetR28_1: R28.1 U1.15 | length 332.4
  Top Layer w10: R28.1 3725,2810 3755,2840 3879.06,2840 3954.21,2915.15 3954.21,2933.19 U1.15
NetR30_1: R30.1 U1.16 | length 244.7
  Top Layer w10: R30.1@3831.97,2769.37 3845,2782.4 3845,2819.14 3850.86,2825 3889.77,2825 3970.63,2905.86 U1.16
NetR31_1: R31.1 U1.30 | length 1582.1
  Top Layer w10: v2(3920,2575) 3920,2240 4168.07,1991.93 4168.07,1962.56 R31.1 ; U1.30 4126.81,3041.46 4148.54,3041.46 4161.69,3028.31 4161.69,2910.81 4275,2797.5 v2(4275,2680)
  Bottom Layer w10: v2(3920,2575) 4170,2575 v2(4275,2680)
NetR33_2: R33.2 U1.17 | length 171.2
  Top Layer w10: R33.2 3906.97,2797.56 3986.38,2876.97 U1.17
NetR34_2: R34.2 R35.1 U1.18 | length 210
  Top Layer w10: R34.2 R35.1 3975,2827.56 3975,2844.38 4001.38,2870.76 4001.38,2919.59 4001.46,2919.67 4001.46,2933.19 U1.18
NetR36_1: R36.1 U1.33 | length 1551.3
  Top Layer w10: U1.33 4126.81,3090.04 4140.33,3090.04 4141.08,3090.79 4145.59,3090.79 4159.81,3105 4290,3105 4415,2980 4415,2545 4600,2360 4600,1982.6 4509.37,1891.97 R36.1
OVP_CTL: Q1.2 U1.22 | length 1786.3
  Top Layer w10: U1.22 4065.12,2854.88 4075,2845 v2(4136,2845) ; Q1.2 4990.36,3944.8 v2(5070,3865.16)
  Bottom Layer w10: v2(4136,2845) 4154.51,2863.51 4158.51,2863.51 5070,3775 v2(5070,3865.16)
Q_DRV1: Q6.2 R27.2 U1.23 | length 392.6
  Top Layer w10: U1.23 4080.87,2889.13 4100,2870 4148.94,2870 4160,2858.94 4160,2830 4147.44,2817.44 R27.2 4147.44,2688.03 4167.6,2667.87 Q6.2
Q_DRV2: Q5.2 R26.1 U1.24 | length 508
  Top Layer w10: Q5.2 R26.1 R26.1 4050,2690 v2(4120,2760) ; U1.24 4096.61,2894.6 4106.21,2885 4160,2885 4175,2870 v2(4175,2760)
  Bottom Layer w10: v2(4120,2760) v2(4175,2760)
SW_BRG2: C29.2 C38.2 P2.2 Q7.3 Q8.2 R32.1 U1.32 | length 2946.4
  Top Layer w10: v2@4114.75,3789.75 v2(4115,3790) ; U1.32 4210.91,3073.62 ; C29.2@4242.56,3038.03 C29.2 C29.2@4242.56,3041.97 ; 4269.58,3073.62 4277.84,3065.37 v2(4280,3065.37) ; Q7.3@4313.38,2129.06 Q7.3@4313.86,2129.53 ; 4351.1,2129.53 4355,2125.63 ; Q8.2@4388.35,2129.53 Q8.2 ; C38.2@4388.82,2201.38 C38.2
  Top Layer w20: P2.2@3516.37,3792.21 3513.91,3789.75 P2.2 3534.04,3751.03 3600.22,3817.21 3818.01,3817.21 3849.22,3786 4111,3786 v2@4114.75,3789.75 ; C29.2@4242.56,3038.03 4392.44,2888.15 C38.2 ; C29.2@4242.56,3041.97 4210.91,3073.62 4269.58,3073.62 ; Q7.3@4262.2,2129.06 4287.79,2129.06 Q7.3@4313.38,2129.06 ; Q7.3@4313.86,2129.53 4351.1,2129.53 Q8.2@4388.35,2129.53 ; R32.1 4355,2125.63 ; Q8.2 C38.2@4388.82,2201.38
  Bottom Layer w10: 4264.31,3083.23 4264.31,3090.69 ; v2(4280,3065.37) v2@4280,3067.53
  Bottom Layer w20: v2(4115,3790) 4136,3769 4136,3300.36 4264.31,3172.05 4264.31,3090.69 ; 4264.31,3083.23 v2@4280,3067.53
V_BRIDGE: C9.2 C16.2 C17.2 C18.2 Q2.2 Q4.2 R5.2 R8.2 R20.2 R21.2 U1.40 | length 4345.6
  Top Layer w10: v3(3955,2280) 3955,2409.53 3993.03,2447.56 R20.2 R20.2@3996.97,2447.56 ; Q4.2@4006.02,2225.12 Q4.2@4006.02,2265.87 ; U1.40 4049.41,3166.18 4049.41,3214.41 v2(4055,3220) ; C9.2 C9.2@4071.97,3362.44 ; Q4.2@4082.8,2225.12 4082.8,2265.87 4100.12,2283.19 4100.12,2284.17 ; R21.2@4153.27,2284.17 R21.2 R21.2@4156.97,2282.44 ; R8.2 R8.2@4526.97,4294.37 ; Q2.2 4559.57,4118.39 4562.84,4121.65 4562.84,4127.17 ; C18.2@5021.81,4254.37 C18.2 ; C18.2@5023.03,4267.56 C18.2@5025,4267.56
  Top Layer w20: v3(3955,2280) 3958.19,2283.19 3988.7,2283.19 Q4.2@4006.02,2265.87 ; Q4.2@4006.02,2225.12 Q4.2@4082.8,2225.12 ; v2(4060,3315) 4070,3325 C9.2 ; C9.2@4071.97,3362.44 4176,3466.47 v2(4176,3530) ; 4100.12,2284.17 R21.2@4153.27,2284.17 ; R8.2 R5.2 ; R8.2@4526.97,4294.37 4585,4236.34 ; 4562.84,4127.17 4585,4149.33 4585,4236.34 ; C18.2@5021.81,4254.37 C17.2 C16.2 v2(4603.03,4254.37) 4585,4236.34
  Bottom Layer w10: 4052.95,3245.95 4060,3253
  Bottom Layer w20: v3(3955,2280) 3760,2475 3595,2475 3529.16,2540.84 3529.16,3210.7 3599.3,3280.84 4004.26,3280.84 4046.05,3239.05 ; 4052.95,3245.95 4052.95,3232.16 4055,3230.11 v2(4055,3220) ; 4060,3253 v2(4060,3315) ; v2(4176,3530) 4590,3944 4590,4241.34 v2(4603.03,4254.37)
VCC_5V: C14.2 C15.2 C25.2 C26.2 L1.1 U1.8 U1.39 | length 1618.3
  Top Layer w10: C26.2 3362.56,3073.19 C25.2 3379.37,3090 L1.1 ; v2(3780,3025) 3797.72,3042.72 3850,3042.72 3863.62,3029.09 3863.62,3026.38 U1.8 ; U1.39 4065.79,3166.81 4065.79,3192 4083.47,3209.68 4083.47,3228.47 v2(4085,3230) 4085,3265 4180,3360 v2(4220,3360) ; v2(4285,3360) C15.2@4335.63,3360 ; C14.2 4327.44,3351.81 C15.2@4335.63,3360 ; C15.2 C15.2@4335.63,3360
  Bottom Layer w10: v2(3560,3090) 3625,3025 v2(3780,3025) 3955,3200 4007.97,3200 4011.97,3196 4064.94,3196 4083.47,3214.53 4083.47,3228.47 v2(4085,3230) ; v2(4220,3360) v2(4285,3360)
VCOIL_OV: C11.2 R11.1 R12.1 U1.19 | length 1699.3
  Top Layer w10: v2(4009.62,2845) 4011.15,2846.53 4011.15,2859.32 4017.87,2866.04 U1.19 ; R12.1 4987.56,3800 4990,3802.44 C11.2 v2(5032.44,3842.44)
  Bottom Layer w10: v2(4009.62,2845) 4095,2845 5032.44,3782.44 v2(5032.44,3842.44)
VIN: C5.2 C6.2 C22.2 C23.2 P1.2 R5.1 R7.2 U1.4 | length 3109.3
  Top Layer w10: C22.2@3533.03,3152.44 C22.2 ; 3843.09,3093.62 3847.35,3089.37 U1.4 ; R5.1 R5.1@4528.78,4478.15 ; C5.2@4750,4481.3 C5.2@4779.53,4481.3
  Top Layer w20: C22.2@3533.03,3152.44 3530.47,3155 3353.61,3155 3341.89,3166.72 P1.2 3282.38,3429.51 3282.38,3916.69 3689.44,4323.75 4167.19,4323.75 4317.8,4474.37 R7.2 R5.1 ; C22.2 3540.75,3158.19 3632.56,3158.19 C23.2 3656.53,3149.09 3699.53,3149.09 3755,3093.62 3843.09,3093.62 ; R5.1@4528.78,4478.15 C6.2 C5.2
pads on no net: P1.3 P1.4 P2.3 P2.4 U1.13 U1.14 U1.25 U1.26 U1.27 U1.28 U1.29 U1.42 U1.43

## Polygon pours and split planes (outlines as drawn)
GND on Bottom Layer "GND_L02_P001" (solid, pour order 1): 2880,4685 2880,1610 5810,1610 5810,4685
GND on Top Layer "GND_L01_P000" (solid, pour order 0): 2880,4685 2880,1610 5810,1610 5810,4685

## Keep-outs
Keep-Out Layer:
  lines w10: 2880,1610 5810,1610 5810,4685 2880,4685 2880,1610

## Silkscreen, mask and mechanical layers (free items; w line width, h text height)
PCB Outline:
  lines w10: 2880,1610 5810,1610 5810,4685 2880,4685 2880,1610